# Altium PCB PICOROM-6412.PcbDoc
Units mm, origin at the board's own origin, x right, y up, seen from the top; angles counter-clockwise.
Board outline 30.48 x 17.8 mm, 4 copper layers (Top Layer, Mid-Layer 1, Layer 1, Bottom Layer), stack 1.591 mm thick; 56 components, 88 nets, 300 pads, 125 vias.
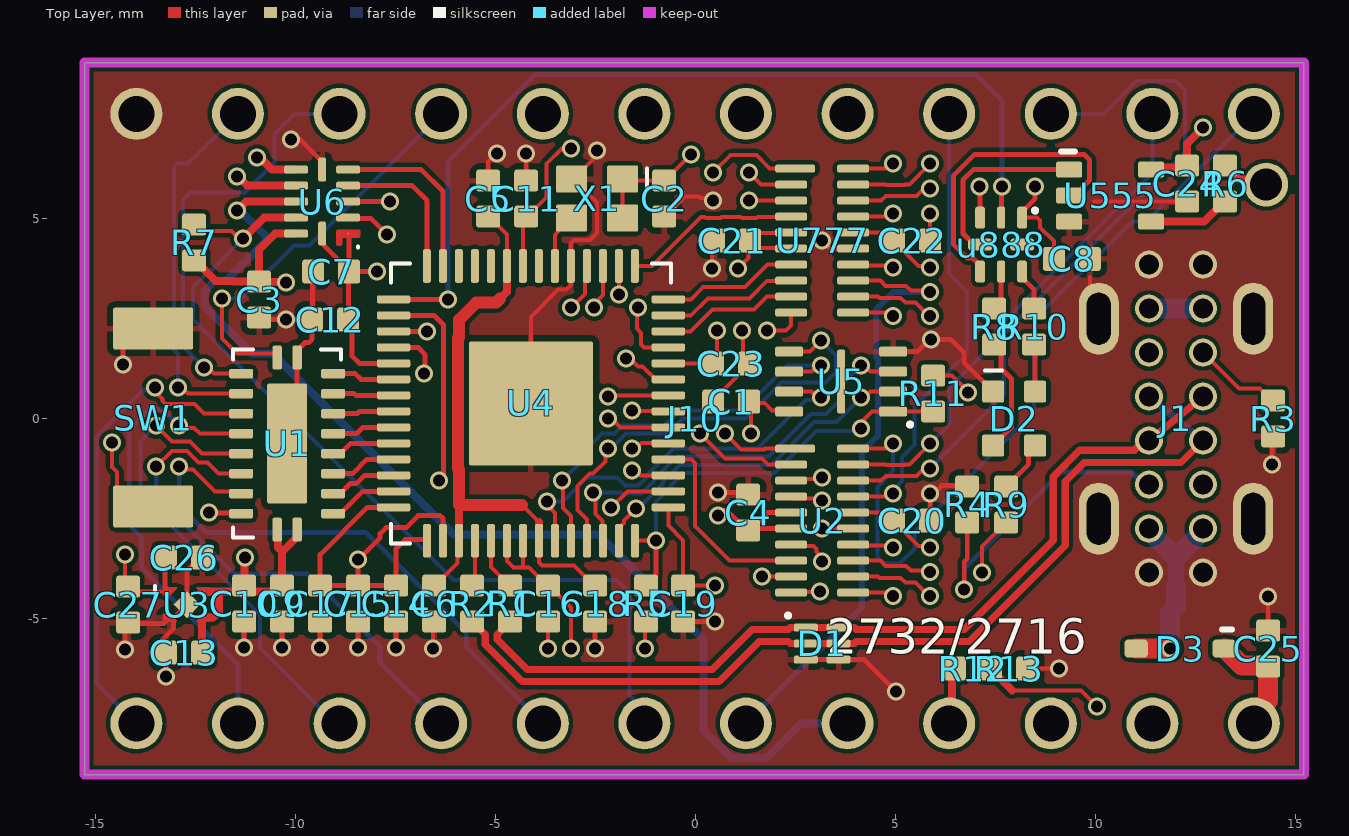
[diagram p0: Top Layer view]
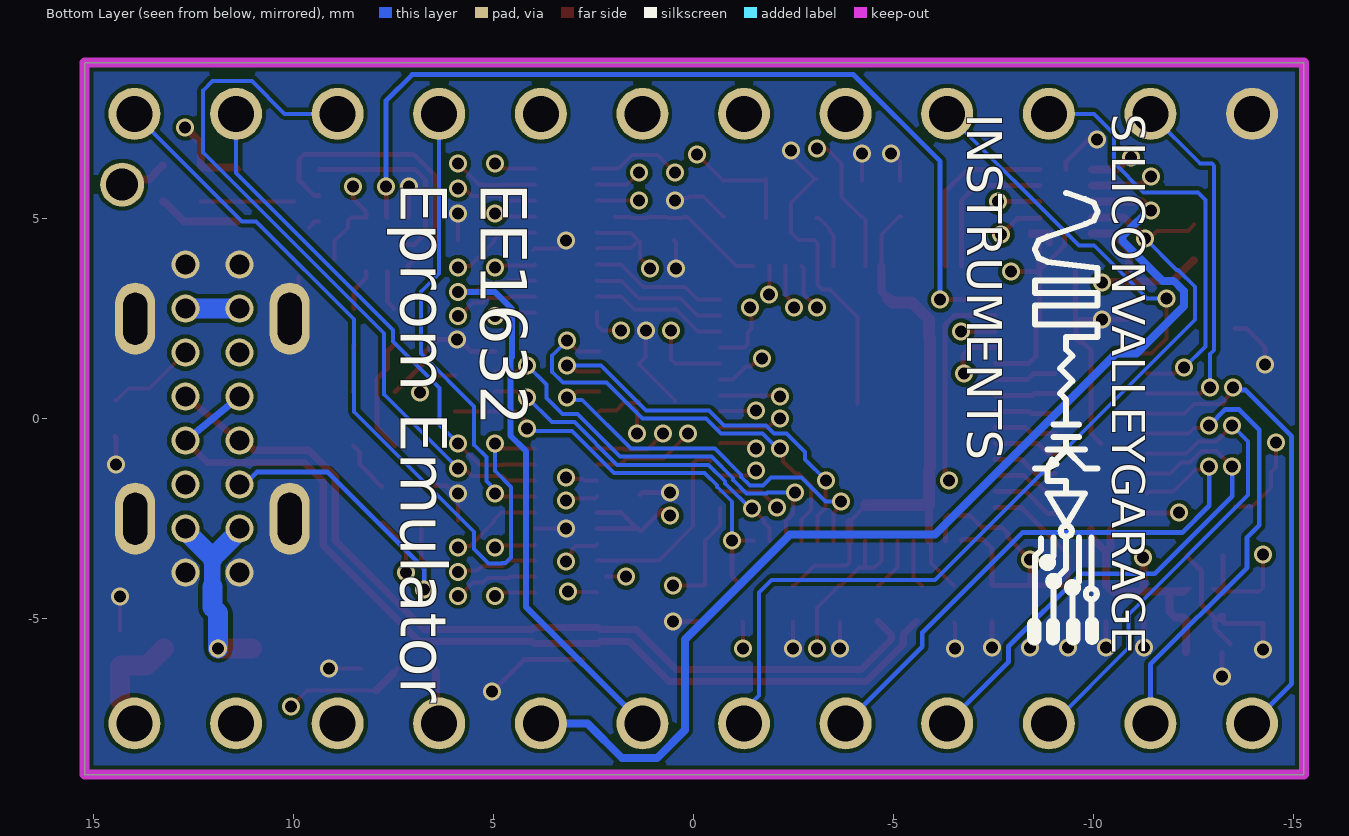
[diagram p1: Bottom Layer view, seen from below]
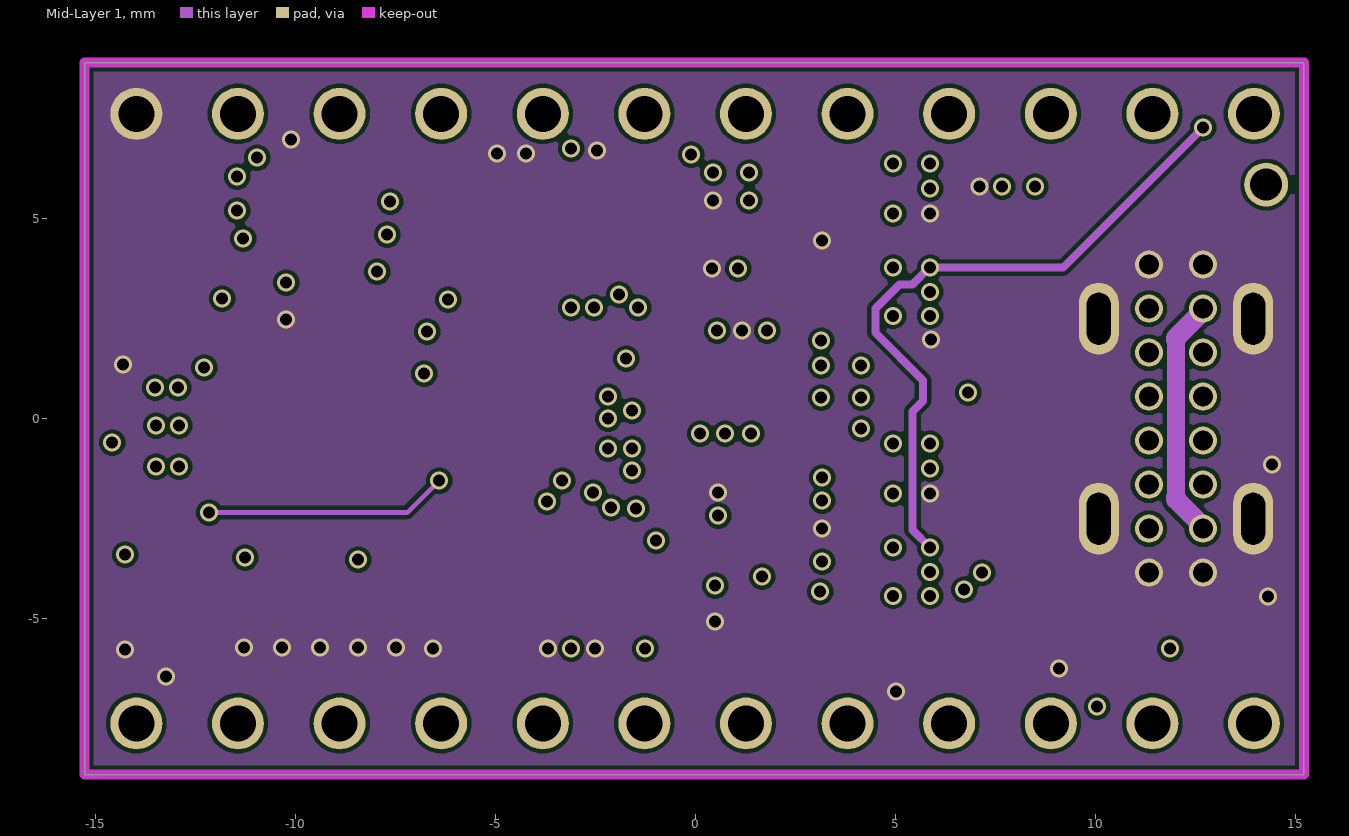
[diagram p2: Mid-Layer 1]
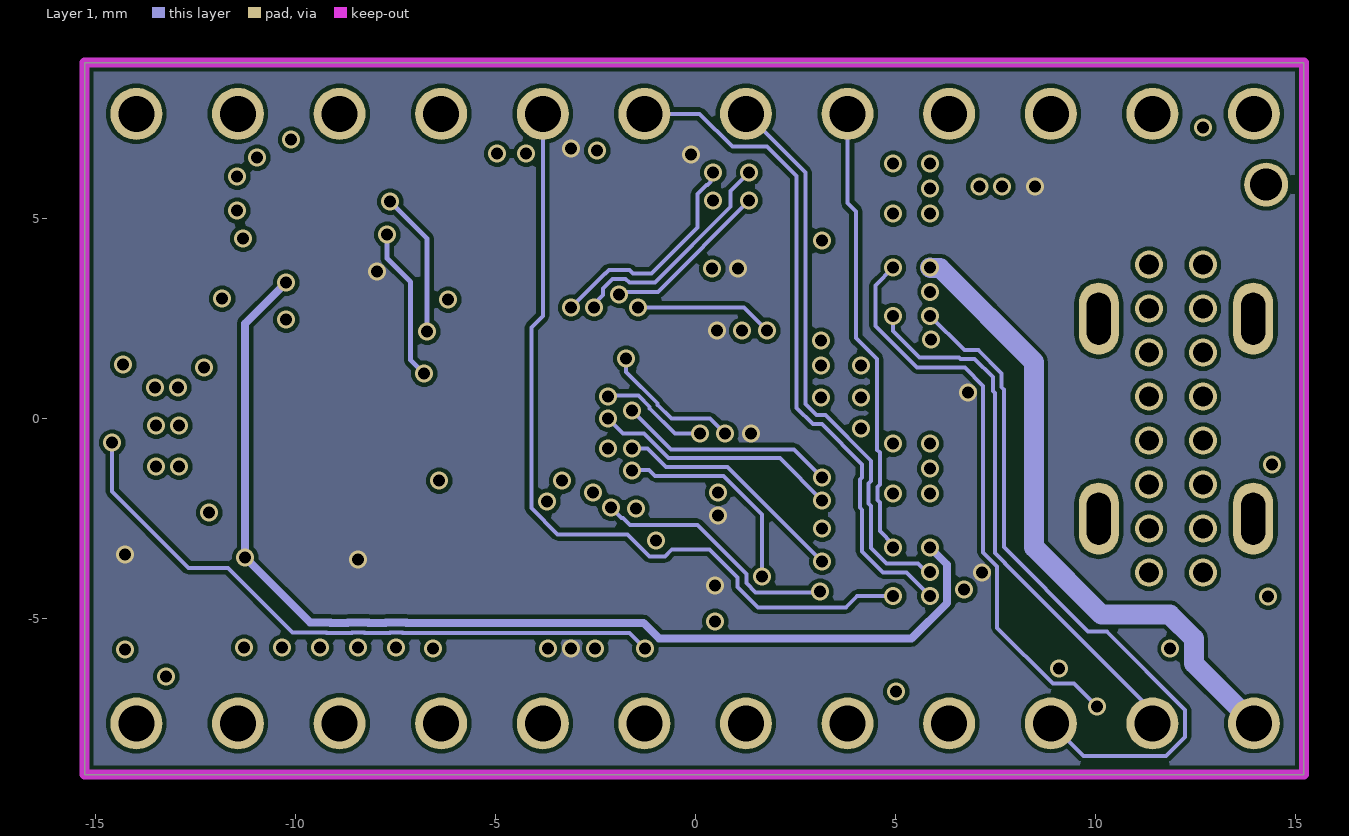
[diagram p3: Layer 1]
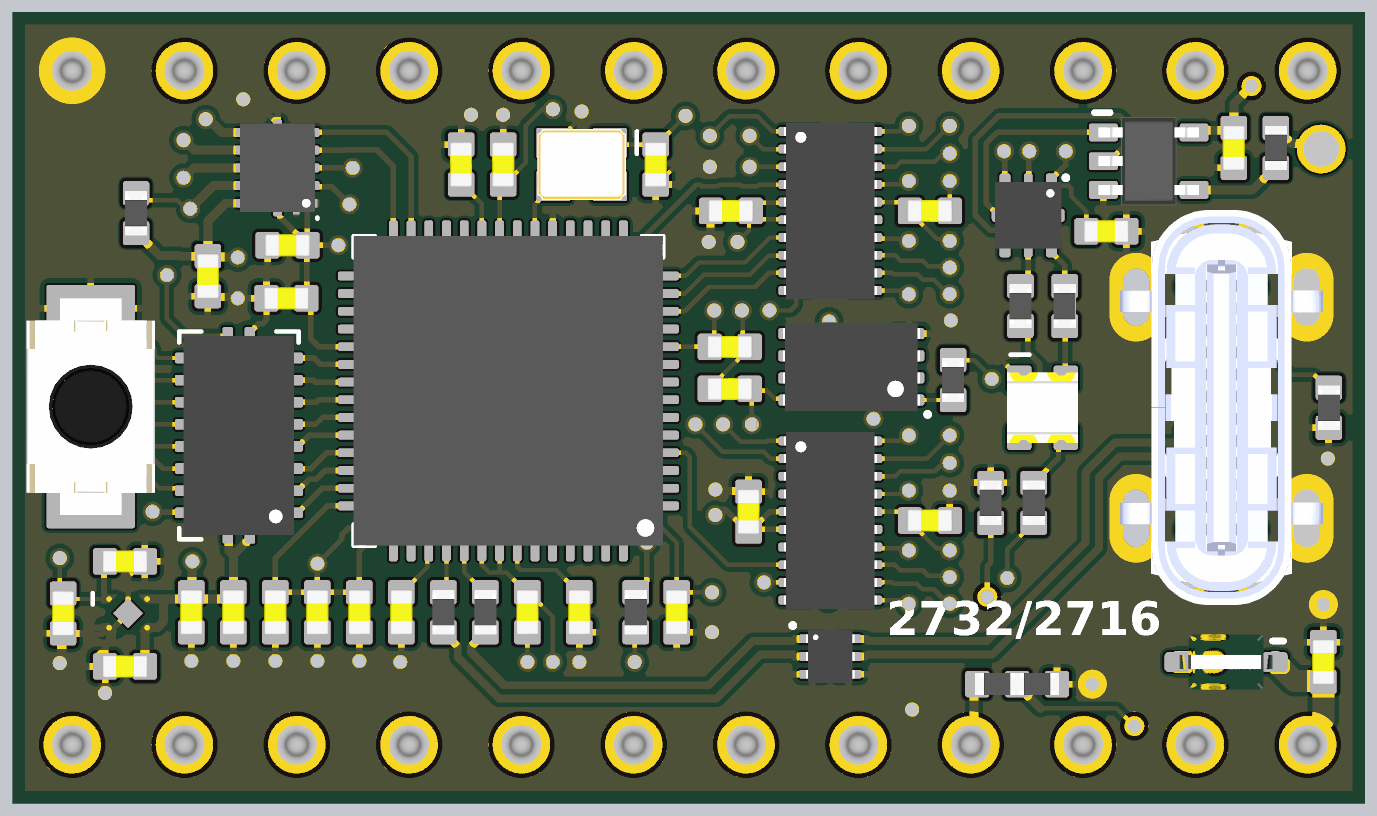
[diagram p4: 3D render of the assembled board from above, using the file's embedded part models]

## Layer stack, top to bottom
Top Solder: solder mask 0.0305, Solder Resist, Dk 3.8
Top Layer: signal copper 0.0356
Dielectric 1: dielectric 0.21, 7628 x 1, Dk 4.4
Mid-Layer 1: signal copper 0.0175
Dielectric2: dielectric 1.065, FR-4, Dk 4.8
Layer 1: signal copper 0.0175
Dielectric 2: dielectric 0.21, 7628 x 1, Dk 4.4
Bottom Layer: signal copper 0.0356
Board Layer Stack Bottom Solder: solder mask 0.0305, Solder Resist, Dk 3.8

## Board outline
-15.264,-8.9 -15.264,8.9 15.216,8.9 15.216,-8.9

## Design rules (kind name [scope] priority, off if disabled: settings)
Clearance [All] p1: gap=0.1 ignorepadtopadclearanceinfootprint=FALSE
ComponentClearance [All] p1 off: gap=0.1 collisioncheckmode=3 verticalgap=0.254 showdistances=FALSE
DiffPairsRouting [InDifferentialPairClass('USB_DIFF')] p1: maxlimit=0.127 minlimit=0.12 mostfreqgap=0.127 toplayer_maxgap=0.12 toplayer_prefgap=0.12 toplayer_minwidth=0.18 toplayer_maxwidth=0.18 toplayer_prefwidth=0.18 midlayer1_mingap=0.127 midlayer1_minwidth=0.144 midlayer1_maxwidth=0.144 midlayer1_prefwidth=0.144 midlayer4_mingap=0.127 midlayer4_minwidth=0.144 midlayer4_maxwidth=0.144 midlayer4_prefwidth=0.144 bottomlayer_maxgap=0.12 bottomlayer_prefgap=0.12 bottomlayer_minwidth=0.18 bottomlayer_maxwidth=0.18 bottomlayer_prefwidth=0.18 impedanceprofiledriven=TRUE impedanceprofileid={56849239-2FA1-4048-BED8-2869ACCAB6FC} impedanceprofilevalue=90.000000 maxuncoupledlength=12.7
Height [All] p1 off: minheight=0 maxheight=25.4 prefheight=12.7
HoleToHoleClearance [All] p1: gap=0.1 allowstackedmicrovias=TRUE
MinimumSolderMaskSliver [All] p1: minsoldermaskwidth=0.099
NetAntennae [All] p1: netantennaetolerance=0.1
PolygonConnect [All] p1: thpad.connectstyle=Direct thpad.reliefconductorwidth=0.254 thpad.reliefentries=4 thpad.polygonreliefangle="90 Angle" thpad.airgapwidth=0.254 smdpad.connectstyle=Relief smdpad.reliefconductorwidth=0.15 smdpad.reliefentries=4 smdpad.polygonreliefangle="90 Angle" smdpad.airgapwidth=0.15 via.connectstyle=Direct via.reliefconductorwidth=0.254 via.reliefentries=4 via.polygonreliefangle="90 Angle" via.airgapwidth=0.254
RoutingVias [All] p1: holewidth=0.3 width=0.45 viastyle="Through Hole" minholewidth=0.2 minwidth=0.45 maxholewidth=0.3 maxwidth=1
SilkToSilkClearance [All] p1: silktosilkclearance=0.1
SilkToSolderMaskClearance [IsPad] p1: minsilkscreentomaskgap=0.1 clearancetoexposedcopper=TRUE
SolderMaskExpansion [All] p1: expansion=0.102 istentingtop=FALSE
SupplyNets "Schematic Supply Nets_9" [InNet('RESET')] p1: voltage=0.000
SupplyNets "Schematic Supply Nets_7" [InNet('EXTRES')] p2: voltage=0.000
SupplyNets "Schematic Supply Nets_6" [InNet('P5V')] p3: voltage=0.000
SupplyNets "Schematic Supply Nets_4" [InNet('P1V1')] p4: voltage=0.000
SupplyNets "Schematic Supply Nets_3" [InNet('P3V3')] p5: voltage=0.000
SupplyNets "Schematic Supply Nets_1" [InNet('GND')] p6: voltage=0.000
SupplyNets "Schematic Supply Nets" [InNet('VUSB')] p7: voltage=0.000
Width [All] p1: maxlimit=5 minlimit=0.1 preferedwidth=0.1
22 further rules are at their usual default settings.

## Classes and differential pairs
differential pair class USB_DIFF: D USB
net class USB: D_N D_P USB_N USB_P
component class U_PicoROM-Core: C1 C2 C3 C4 C5 C6 C7 C8 C9 C10 C11 C12 C13 C14 C15 C16 C17 C18 C19 C20 C21 C22 C23 C24 C25 C26 C27 D1 D2 D3 J1 R1 R2 R3 R4 R5 R6 R7 R8 R9 R10 R11 SW1 U1 U2 U3 U4 U5 U6 U555 U777 U888 X1
component class 2716-2736: J10 R12 R13 U7
differential pair USB: +USB_P -USB_N
differential pair D: +D_P -D_N

## Components (designator, comment, footprint, x,y, rotation, side; value= is the part's Value field where it differs from the comment)
C1 "CAP0402" CAPC0402 0.9,0.425 r180 top
C2 "CAP0402" CAPC0402 -0.775,5.5 r270 top
C3 "CAP0402" CAPC0402 -10.9,2.975 r270 top
C4 "CAP0402" CAPC0402 1.325,-2.35 r90 top
C5 "CAP0402" CAPC0402 -5.175,5.5 r90 top
C6 "CAP0402" CAPC0402 -6.525,-4.625 r270 top
C7 "CAP0402" CAPC0402 -9.1,3.675 r180 top
C8 "CAP0402" CAPC0402 9.416,3.991 r0 top
C9 "CAP0402" CAPC0402 -10.325,-4.625 r270 top
C10 "CAP0402" CAPC0402 -11.275,-4.625 r270 top
C11 "CAP0402" CAPC0402 -4.225,5.5 r90 top
C12 "CAP0402" CAPC0402 -9.125,2.475 r180 top
C13 "CAP0402" CAPC0402 -12.775,-5.85 r180 top
C14 "CAP0402" CAPC0402 -7.475,-4.625 r270 top
C15 "CAP0402" CAPC0402 -8.425,-4.625 r270 top
C16 "CAP0402" CAPC0402 -3.675,-4.625 r270 top
C17 "CAP0402" CAPC0402 -9.375,-4.625 r270 top
C18 "CAP0402" CAPC0402 -2.5,-4.625 r270 top
C19 "CAP0402" CAPC0402 -0.3,-4.625 r270 top
C20 "CAP0402" CAPC0402 5.425,-2.55 r0 top
C21 "CAP0402" CAPC0402 0.925,4.45 r180 top
C22 "CAP0402" CAPC0402 5.425,4.45 r0 top
C23 "CAP0402" CAPC0402 0.9,1.375 r0 top
C24 "CAP0402" CAPC0402 12.3,5.875 r270 top
C25 "CAP0402" CAPC0402 14.325,-5.75 r90 top
C26 "CAP0402" CAPC0402 -12.775,-3.475 r0 top
C27 "CAP0402" CAPC0402 -14.175,-4.65 r270 top
D1 "CDDFN6-3312P" SON40P100X50-6L 3.175,-5.625 r0 top
D2 "RGB" LED-1616-RGB 7.975,0 r90 top
D3 "1N5819" SOD323 12.125,-5.75 r180 top
J1 "TYPE-C-612-LDRH650" CONN-USBC-USB2-VERT-XUNPU-TYPE-C-612-LDRH650 12.02,0 r270 top
J10 "IC-EPROM-2716-PINOUT" DIL24-PLUG 0,0 r180 top locked
R1 "RESC0402" RESC0402 -4.625,-4.625 r90 top value=27R
R2 "RESC0402" RESC0402 -5.575,-4.625 r90 top value=27R
R3 "RESC0402" RESC0402 14.45,0 r90 top value=5K1
R4 "RESC0402" RESC0402 6.8,-2.15 r90 top value=5K1
R5 "RESC0402" RESC0402 -1.225,-4.625 r90 top value=1K
R6 "RESC0402" RESC0402 13.25,5.875 r270 top value=27R
R7 "RESC0402" RESC0402 -12.525,4.4 r270 top value=100K
R8 "RESC0402" RESC0402 7.475,2.3 r90 top value=1K
R9 "RESC0402" RESC0402 7.775,-2.15 r270 top value=1K
R10 "RESC0402" RESC0402 8.475,2.3 r90 top value=1K
R11 "RESC0402" RESC0402 5.95,0.625 r90 top value=10K
R12 "RESC0402" RESC0402 6.95,-6.25 r180 top value=27R
R13 "RESC0402" RESC0402 7.85,-6.25 r180 top value=27R
SW1 "SWITCH-XUNPU-TS-1088-AR02016" SWITCH-XUNPU-TS-1088-AR02016 -13.55,0.025 r270 top
U1 "74AHCT245" QFN50P450X250-20TH300X100 -10.2,-0.625 r180 top
U2 "TXB108" SON40P200X55-20N 3.175,-2.55 r0 top
U3 "TPS7A0233PDQNR" X2SON4-1X1 -12.705,-4.65 r0 top
U4 "IC-RPI-RP2040-PICOROM" QFN40P700X700X90-56N-TH310X310 -4.105,0.381 r180 top locked
U5 "W25Q16JVUXIQ" SON50P300X60_HS-9N 3.65,0.925 r180 top
U6 "TXB104" FOOTPRINT-TI-RUT -9.325,5.425 r180 top
U555 "74LVC1GT126" SOT353 10.375,5.575 r0 top
U777 "TXB108" SON40P200X55-20N 3.175,4.45 r0 top
u888 "TCA5405" PQFN50P150X150X40-8N 7.65,4.35 r270 top (schematic designator U888)
X1 "XOSC" XOSC-YXC-2016 -2.45,5.5 r180 top

## Footprints (in the part's own frame and the unit in brackets; to place one, negate y for a bottom-side part, rotate by r counter-clockwise, add the part's x,y. Pads: shape width x height; smd on the part's side, far side on the other; paste and mask are expansions set on the pad)
CAPC0402 [mm] "CAPACITOR, CHIP 0402 (1005) 0.5MM THICK"
  rrect25% 0.55x0.6 smd paste+0 mask+0.075: 1(-0.45,0) 2(0.45,0)
  body extent -0.51,-0.25 0.51,0.26, height 0.52
CONN-USBC-USB2-VERT-XUNPU-TYPE-C-612-LDRH650 [mm] "CONN-USBC-USB2-VERT-XUNPU-TYPE-C-612-LDRH650"
  oval 1.8x1 hole 0.6 slot 1.3 at 0 deg: 1(-2.5,1.93) 2(2.5,1.93) 3(2.5,-1.93) 4(-2.5,-1.93)
  round 0.7 hole 0.5 mask+0.05: A1(-3.85,0.675) A4(-2.75,0.675) A5(-1.65,0.675) A6(-0.55,0.675) A7(0.55,0.675) A8(1.65,0.675) A9(2.75,0.675) A12(3.85,0.675) B1(3.85,-0.675) B4(2.75,-0.675) B5(1.65,-0.675) B6(0.55,-0.675) B7(-0.55,-0.675) B8(-1.65,-0.675) B9(-2.75,-0.675) B12(-3.85,-0.675)
  body extent -4.47,-2.3 4.47,2.3, height 6.41
DIL24-PLUG [mm]
  round 1.3 hole 0.9: 1(-13.97,-7.62) 2(-11.43,-7.62) 3(-8.89,-7.62) 4(-6.35,-7.62) 5(-3.81,-7.62) 6(-1.27,-7.62) 7(1.27,-7.62) 8(3.81,-7.62) 9(6.35,-7.62) 10(8.89,-7.62) 11(11.43,-7.62) 12(13.97,-7.62) 13(13.97,7.62) 14(11.43,7.62) 15(8.89,7.62) 16(6.35,7.62) 17(3.81,7.62) 18(1.27,7.62) 19(-1.27,7.62) 20(-3.81,7.62) 21(-6.35,7.62) 22(-8.89,7.62) 23(-11.43,7.62) 24(-13.97,7.62)
  body extent -15.24,-8.9 15.24,8.9, height 8.01
FOOTPRINT-TI-RUT [mm] "R-PUQFN-N12, TI RUT"
  round 0.025 smd paste+0 mask+0.05: 1(-0.65,0.8)
  rrect50% 0.6x0.2 smd paste+0 mask+0.05: 2(-0.65,0.4) 3(-0.65,0) 4(-0.65,-0.4) 5(-0.65,-0.8) 7(0.65,-0.8) 8(0.65,-0.4) 9(0.65,0) 10(0.65,0.4) 11(0.65,0.8)
  rrect50% 0.2x0.6 smd paste+0 mask+0.05: 6(0,-0.8) 12(0,0.8)
  Top Layer region: -0.9,0.9 -0.919,0.896 -0.935,0.885 -0.946,0.869 -0.95,0.85 -0.95,0.85 -0.95,0.75 -0.946,0.731 -0.935,0.715 -0.919,0.704 -0.9,0.7 -0.9,0.7 -0.4,0.7 -0.381,0.704 -0.365,0.715 -0.354,0.731 -0.35,0.75 -0.35,0.75 -0.35,1.05 -0.354,1.069 -0.365,1.085 -0.381,1.096 -0.4,1.1 -0.4,1.1 -0.45,1.1 -0.469,1.096 -0.485,1.085 -0.496,1.069 -0.5,1.05 -0.5,1.05 -0.5,0.95 -0.504,0.931 -0.515,0.915 -0.531,0.904 -0.55,0.9 -0.55,0.9
  silkscreen extent -0.9,1.12 -0.9,1.15, body extent -0.85,-1 0.85,1, height 0.55
LED-1616-RGB [mm]
  rrect18% 0.55x0.55 smd paste+0 mask+0.05: 1(0.675,0.525) 2(-0.675,0.525) 3(-0.675,-0.525) 4(0.675,-0.525)
  silkscreen extent 1.2,0.3 1.2,0.72, body extent -0.8,-0.8 0.8,0.8, height 0.71
PQFN50P150X150X40-8N [mm] "PQFN, 8-Leads, Body 1.50x1.50mm, Pitch 0.50mm, IPC Medium Density"
  rrect50% 0.55x0.25 smd mask+0.05: 1(-0.675,0.525) 3(-0.675,-0.525) 5(0.675,-0.525) 7(0.675,0.525)
  rrect50% 0.55x0.2 smd mask+0.05: 2(-0.675,0) 6(0.675,0)
  rrect50% 0.3x0.6 smd mask+0.05: 4(0,-0.525) 8(0,0.525)
  silkscreen extent -0.9,0.8 -0.8,0.9, body extent -0.75,-0.75 0.75,0.75, height 0.4
QFN40P700X700X90-56N-TH310X310 [mm]
  rrect50% 0.84x0.2 smd mask+0.05: 1(-3.435,2.6) 2(-3.435,2.2) 3(-3.435,1.8) 4(-3.435,1.4) 5(-3.435,1) 6(-3.435,0.6) 7(-3.435,0.2) 8(-3.435,-0.2) 9(-3.435,-0.6) 10(-3.435,-1) 11(-3.435,-1.4) 12(-3.435,-1.8) 13(-3.435,-2.2) 14(-3.435,-2.6) 29(3.435,-2.6) 30(3.435,-2.2) 31(3.435,-1.8) 32(3.435,-1.4) 33(3.435,-1) 34(3.435,-0.6) 35(3.435,-0.2) 36(3.435,0.2) 37(3.435,0.6) 38(3.435,1) 39(3.435,1.4) 40(3.435,1.8) 41(3.435,2.2) 42(3.435,2.6)
  rrect50% 0.2x0.84 smd mask+0.05: 15(-2.6,-3.435) 16(-2.2,-3.435) 17(-1.8,-3.435) 18(-1.4,-3.435) 19(-1,-3.435) 20(-0.6,-3.435) 21(-0.2,-3.435) 22(0.2,-3.435) 23(0.6,-3.435) 24(1,-3.435) 25(1.4,-3.435) 26(1.8,-3.435) 27(2.2,-3.435) 28(2.6,-3.435) 43(2.6,3.435) 44(2.2,3.435) 45(1.8,3.435) 46(1.4,3.435) 47(1,3.435) 48(0.6,3.435) 49(0.2,3.435) 50(-0.2,3.435) 51(-0.6,3.435) 52(-1,3.435) 53(-1.4,3.435) 54(-1.8,3.435) 55(-2.2,3.435) 56(-2.6,3.435)
  rrect3% 3.1x3.1 smd paste-0.57 mask+0.05: 57(0,0)
  silkscreen extent -3.5,-3.5 3.5,3.5, body extent -3.5,-3.5 3.5,3.5, height 0.9
QFN50P450X250-20TH300X100 [mm]
  rrect41% 0.24x0.6 smd mask+0.051: 1(-0.25,2.15) 10(-0.25,-2.15) 11(0.25,-2.15) 20(0.25,2.15)
  rrect41% 0.6x0.24 smd mask+0.051: 2(-1.15,1.75) 3(-1.15,1.25) 4(-1.15,0.75) 5(-1.15,0.25) 6(-1.15,-0.25) 7(-1.15,-0.75) 8(-1.15,-1.25) 9(-1.15,-1.75) 12(1.15,-1.75) 13(1.15,-1.25) 14(1.15,-0.75) 15(1.15,-0.25) 16(1.15,0.25) 17(1.15,0.75) 18(1.15,1.25) 19(1.15,1.75)
  rrect10% 1x3 smd mask+0.051: 21(0,0)
  silkscreen extent -1.35,-2.35 1.35,2.35, body extent -1.25,-2.25 1.25,2.25, height 0.9
RESC0402 [mm] "RESISTOR, CHIP 0402 (1005)"
  rrect25% 0.55x0.6 smd paste+0 mask+0.075: 1(-0.45,0) 2(0.45,0)
  body extent -0.5,-0.25 0.5,0.25, height 0.27
SOD323 [mm] "SOD323"
  rrect44% 0.59x0.45 smd paste+0 mask+0.05: 1(-1.1,0) 2(1.1,0)
  silkscreen extent -1.3,-0.48 -1.05,-0.48, body extent -1.25,-0.63 1.25,0.63, height 1.1
SON40P100X50-6L [mm] "SON, 6-Leads, Body 1.20x1.00mm, Pitch 0.40mm, IPC High Density"
  rrect50% 0.6x0.2 smd mask+0.05: 1(-0.41,0.4) 2(-0.41,0) 3(-0.41,-0.4) 4(0.41,-0.4) 5(0.41,0) 6(0.41,0.4)
  silkscreen extent -0.9,0.65 -0.8,0.75, body extent -0.55,-0.6 0.55,0.6, height 0.5
SON40P200X55-20N [mm] "SON, 20-Leads, Body 4.00x2.00mm, Pitch 0.40mm, IPC Medium Density"
  rrect50% 1x0.2 smd mask+0.05: 1(-0.675,1.8)
  rrect50% 0.8x0.2 smd mask+0.05: 2(-0.775,1.4) 3(-0.775,1) 4(-0.775,0.6) 5(-0.775,0.2) 6(-0.775,-0.2) 7(-0.775,-0.6) 8(-0.775,-1) 9(-0.775,-1.4) 10(-0.775,-1.8) 11(0.775,-1.8) 12(0.775,-1.4) 13(0.775,-1) 14(0.775,-0.6) 15(0.775,-0.2) 16(0.775,0.2) 17(0.775,0.6) 18(0.775,1) 19(0.775,1.4) 20(0.775,1.8)
  body extent -1.05,-2 1.05,2, height 0.55
SON50P300X60_HS-9N [mm] "SON, 8-Leads, Body 2.00x3.00mm, Pitch 0.50mm, Thermal Pad 1.60x0.20mm, IPC Medium Density"
  rrect40% 0.7x0.25 smd mask+0.05: 1(-1.3,0.75) 2(-1.3,0.25) 3(-1.3,-0.25) 4(-1.3,-0.75) 5(1.3,-0.75) 6(1.3,-0.25) 7(1.3,0.25) 8(1.3,0.75)
  rrect50% 0.2x1.6 smd mask+0.05: 9(0,0)
  silkscreen extent -1.78,1.03 -1.68,1.12, body extent -1.55,-1 1.55,1, height 0.6
SOT353 [mm] "SOT353 SC70-5"
  rrect25% 0.65x0.4 smd paste+0 mask+0.05: 1(-1.025,0.65) 2(-1.025,0) 3(-1.025,-0.65) 4(1.025,-0.65) 5(1.025,0.65)
  silkscreen extent -1.22,1.1 -0.87,1.1, body extent -1.14,-1 1.14,1, height 0.94
SWITCH-XUNPU-TS-1088-AR02016 [mm] "LCSC C720477"
  rrect9% 1.05x2 smd paste+0 mask+0.05: 1(-2.225,0) 2(2.225,0)
  body extent -2.45,-1.45 2.45,1.45, height 2
X2SON4-1X1 [mm] "FOOTPRINT, TI, DQN0004A X2SON4"
  round 0.025 smd mask+0.05: 1(-0.43,0.325) 2(-0.43,-0.325) 3(0.43,-0.325) 4(0.43,0.325)
  rrect4% 0.48x0.48 smd rot 45 mask+0.05: 5(0,0)
  Top Layer region: 0.43,0.22 0.25,0.4 0.25,0.43 0.559,0.43 0.579,0.426 0.595,0.415 0.606,0.399 0.61,0.379 0.61,0.379 0.61,0.271 0.606,0.251 0.595,0.235 0.579,0.224 0.559,0.22 0.559,0.22 0.52,0.22
  Top Layer region: -0.43,0.22 -0.25,0.4 -0.25,0.43 -0.559,0.43 -0.579,0.426 -0.595,0.415 -0.606,0.399 -0.61,0.379 -0.61,0.379 -0.61,0.271 -0.606,0.251 -0.595,0.235 -0.579,0.224 -0.559,0.22 -0.559,0.22 -0.52,0.22
  Top Layer region: -0.43,-0.22 -0.25,-0.4 -0.25,-0.43 -0.559,-0.43 -0.579,-0.426 -0.595,-0.415 -0.606,-0.399 -0.61,-0.379 -0.61,-0.379 -0.61,-0.271 -0.606,-0.251 -0.595,-0.235 -0.579,-0.224 -0.559,-0.22 -0.559,-0.22 -0.52,-0.22
  Top Layer region: 0.43,-0.22 0.25,-0.4 0.25,-0.43 0.559,-0.43 0.579,-0.426 0.595,-0.415 0.606,-0.399 0.61,-0.379 0.61,-0.379 0.61,-0.271 0.606,-0.251 0.595,-0.235 0.579,-0.224 0.559,-0.22 0.559,-0.22 0.52,-0.22
  silkscreen extent -0.8,0.2 -0.8,0.46, body extent -0.5,-0.5 0.5,0.5, height 0.4
XOSC-YXC-2016 [mm] "YSO110TR"
  rrect10% 0.775x0.675 smd paste+0 mask+0.05: 1(-0.637,-0.487) 2(0.637,-0.487) 3(0.637,0.487) 4(-0.637,0.487)
  silkscreen extent -1.25,-0.75 -1.25,-0.24, body extent -1,-0.8 1,0.8, height 0.76

## Part data
C1 C2 C3 C4 C5 C6 C7 C8 C9 C10 C11 C12 C13 C14 C15 C16 C17 C18 C19 C20 C21 C22 C23 C24 C25 C26 C27: library part CAPC-0402-100nF-16V-X7R, "CAPACITOR,CERAMIC,100nF,16V,X7R,0402", Capacitance=100nF, Dielectric=X7R, LCSC=C60474, Manufacturer 1=YAGEO, Manufacturer Part Number 1=CC0402KRX7R7BB104, Package / Case=0402, Supplier Part Number 1=1292-1630-1-ND, Voltage=16V, MOUSER=603-CC402KRX7R7BB104, Supplier 1=Digikey
D1: library part TVS-BOURNS-CDDFN6-3312P, "TVS,USB,BOURNS,CDDFN6-3312P", LCSC=C3700524, Manufacturer 1=BOURNS, Manufacturer Part Number 1=CDDFN6-3312P
D2: library part LED-TOGIALED-TJ-S1615CY6TGLCCSRGB-A5, "LED,SMD,RGB", LCSC=C601684, Manufacturer 1=TIOGALED, Manufacturer Part Number 1=TJ-S1615CY6TGLCCSRGB-A5
D3: library part DIODE-SCHOTTKY-1N5819-SOD323, "DIODE,SCHOTTKY,40V,0.6A,1N5819,SOD323", LCSC=C191023, Manufacturer 1="GUANGDONG HOTTECH", Manufacturer Part Number 1=1N5819WS, MOUSER=637-SK115
J1: library part CONN-USBC-USB2-VERT-XUNPU-TYPE-C-612-LDRH650, "CONN,USB-C,16P,VERTICAL,TH", LCSC=C25011963, Manufacturer 1=XUNPU, Manufacturer Part Number 1=TYPE-C-612-LDRH650
J10: "CONN,DIP24,MALE PINHEADER,TURNED PIN,GOLD", Manufacturer 1=CNCTECH, Manufacturer Part Number 1=220-1-24-006, DIGIKEY=1175-1524-5-ND
R1 R2 R6 R12 R13: library part RESC-0402-27R-1%-1/10W, "RESISTOR,27R,1%,63mW,0402 (1005)", LCSC=C138021, Power=1/16W, Supplier Part Number 1=2577120, Tolerance=1%, Supplier 1="Future Electronics"
R3 R4: library part RESC-0402-5K1-1%-1/10W, "RESISTOR,5K1,1%,63mW,0402 (1005)", LCSC=C25905, Manufacturer 1=UNIROYAL, Manufacturer Part Number 1=0402WGF5101TCE, Power=1/16W, Tolerance=1%
R5 R8 R9 R10: library part RESC-0402-1K-1%-1/10W, "RESISTOR,1K,1%,63mW,0402 (1005)", LCSC=C11702, Manufacturer 1=UNIROYAL, Manufacturer Part Number 1=0402WGF1001TCE, Power=1/16W, Tolerance=1%
R7: library part RESC-0402-100K-1%-1/10W, "RESISTOR,100K,1%,63mW,0402 (1005)", LCSC=C25741, Manufacturer 1=UNIROYAL, Manufacturer Part Number 1=0402WGF1003TCE, Power=1/16W, Tolerance=1%
R11: library part RESC-0402-10K-1%-1/10W, "RESISTOR,10K,1%,63mW,0402 (1005)", LCSC=C25744, Manufacturer 1=UNIROYAL, Manufacturer Part Number 1=0402WGF1002TCE, Power=1/16W, Tolerance=1%
SW1: "SWITCH,TACT,SMD,2PIN,SMT,TOP ACTUATOR", LCSC=C720477, Manufacturer 1=XUNPU, Manufacturer Part Number 1=TS-1088-AR02016
U1: library part IC-NEXPERIA-74AHCT245, "IC,BUS BUFFER,74245, QQFN420X250", LCSC=C554611, Manufacturer 1=NEXPERIA, Manufacturer Part Number 1=74AHCT245BQ,115
U2 U777: library part IC-TI-TXB0108-DQS, "IC,LEVEL SHIFTER,8CH,DUAL SUPPLY, TI TXB108", LCSC=C427057, Manufacturer 1=TI, Manufacturer Part Number 1=TXB0108DQSR
U3: library part IC-TI-TPS7A0233PDQNR, "IC,VOLTAGE REG,LIN,POSITIVE,3V3", LCSC=C2860046, Manufacturer 1=TI, Manufacturer Part Number 1=TPS7A0233PDQNR
U4: "IC,MICROCONTROLLER,RP2040, PICOROM SYMBOL", LCSC=C2040, Manufacturer 1=RPI, Manufacturer Part Number 1=RP2040
U5: library part IC-WINBOND-W25Q16JVUXIQ, "IC,FLASH,16Mbit, USON", LCSC=C2843335, Manufacturer 1=WINBOND, Manufacturer Part Number 1=W25Q16JVUXIQ
U6: library part IC-TI-TXB0104-RUT, "IC,LEVEL SHIFTER,4CH,DUAL SUPPLY, TI TXB104", LCSC=C105266, Manufacturer 1=TI, Manufacturer Part Number 1=TXB0104RUTR
U555: library part IC-ONSEMI-M74VHC1GT126DF2G, "IC,BUFFER WITH OE, ONSEMI M74VHC1GT126DF2G", LCSC=C233496, Manufacturer 1=ONSEMI, Manufacturer Part Number 1=M74VHC1GT126DF2G
u888: library part IC-TI-TCA5405RUGR, "IC,IO EXPANDER, SINGLE WIRE, 5 OUTPUTS, TI TCA5405", LCSC=C2674123, Manufacturer 1=TI, Manufacturer Part Number 1=TCA5405RUGR, MPN=C2674123
X1: library part XOSC-YXC-OT201612MJBA4SL, "XOSC,12MHz,2016", LCSC=C669076, Manufacturer 1="YXC Crystal Oscillators", Manufacturer Part Number 1=OT201612MJBA4SL

## Free pads (board coordinates)
  round 1.1 hole 0.8 mask+0.05: 2(14.275,5.85)

## Via types
v1: diameter 0.45, hole 0.3, Top Layer to Bottom Layer, tented both sides, 119 vias
v2: diameter 0.45, hole 0.3, Top Layer to Bottom Layer, 6 vias

## Nets (pads, with @x,y where several pads share a name; then routed paths per layer and width w, separated by ;. In a path a pad name is that pad's centre, name@x,y a point inside that pad or via, vN(x,y) a via of type N, cw(c..) or ccw(c..) an arc to the next point about the centre after c; other vN are vias at no path point)
A0: U2.10 U4.2 | length 8.6
  Top Layer w0.1: v1(-2.1,-2.225) -1.694,-1.819 U4.2 ; U2.10 2.413,-4.337 3.113,-4.337 v1(3.125,-4.325)
  Layer 1 w0.1: v1(-2.1,-2.225) -1.843,-2.482 -1.802,-2.482 -1.629,-2.655 0.054,-2.655 1.28,-3.881 1.28,-4.114 1.511,-4.345 3.105,-4.345 v1(3.125,-4.325)
A1: U2.9 U4.3 | length 6.7
  Top Layer w0.1: v1(-1.575,-1.3) -1.48,-1.3 -1.361,-1.419 U4.3 ; v1(1.675,-3.95) U2.9@2.175,-3.95
  Layer 1 w0.1: v1(-1.575,-1.3) -1.555,-1.28 -1.15,-1.28 -1,-1.43 0.714,-1.43 1.675,-2.391 v1(1.675,-3.95)
A2: U2.8 U4.4 | length 4.8
  Top Layer w0.1: U4.4@-0.431,-1.056 -0.394,-1.019 -0.096,-1.019 0,-1.115 0,-2.689 0.861,-3.55 U2.8
A3: U2.7 U4.5 | length 7.9
  Top Layer w0.1: v1(-1.575,-0.75) -1.48,-0.75 -1.34,-0.609 -0.68,-0.609 U4.5 ; U2.7 2.437,-3.187 2.961,-3.187 3.032,-3.258 3.032,-3.337 3.175,-3.48 v1(3.175,-3.575)
  Layer 1 w0.1: v1(-1.575,-0.75) -1.191,-0.75 -0.731,-1.21 0.805,-1.21 0.845,-1.25 0.85,-1.25 v1(3.175,-3.575)
A4: U2.4 U4.6 | length 8.6
  Top Layer w0.1: v1(-2.175,0) -2.083,0 -1.864,-0.219 U4.6 ; U2.4 2.45,-2 3.125,-2 v1(3.175,-2.05)
  Layer 1 w0.1: v1(-2.175,0) -1.8,-0.375 -1.283,-0.375 -0.668,-0.99 2.115,-0.99 v1(3.175,-2.05)
A5: U2.3 U4.7 | length 7.2
  Top Layer w0.1: v1(-1.575,0.2) -1.566,0.191 -0.68,0.191 U4.7 ; U2.3@2.404,-1.55 2.713,-1.55 2.75,-1.513 3.137,-1.513 v1(3.175,-1.475)
  Layer 1 w0.1: v1(-1.575,0.2) -0.605,-0.77 2.47,-0.77 v1(3.175,-1.475)
A6: U2.2 U4.8 | length 6.8
  Top Layer w0.1: v1(-2.175,0.55) -2.144,0.581 U4.8 ; v1(0.125,-0.375) 0.747,-0.997 1.669,-0.997 1.822,-1.15 U2.2
  Layer 1 w0.1: v1(-2.175,0.55) -2.15,0.575 -1.42,0.575 -1.135,0.291 -1.135,0.257 -0.504,-0.375 v1(0.125,-0.375)
A7: U2.1 U4.9 | length 6.7
  Top Layer w0.1: v1(-1.725,1.5) -1.63,1.5 -1.432,1.302 -1.322,1.302 -1.131,1.111 -1.12,1.111 -0.99,0.981 U4.9 ; v1(0.75,-0.375) 1.145,-0.77 1.729,-0.77 1.749,-0.75 U2.1
  Layer 1 w0.1: v1(-1.725,1.5) -1.725,1.163 -0.935,0.374 -0.935,0.339 -0.596,0 0.375,0 v1(0.75,-0.375)
A8: U4.11 U777.10 | length 6.1
  Top Layer w0.1: v1(-1.425,2.775) -1.46,2.74 -1.46,2.247 -1.357,2.144 -1.357,1.858 -1.278,1.778 -0.673,1.778 U4.11 ; v1(1.8,2.2) 2.275,2.2 2.4,2.325 U777.10
  Layer 1 w0.1: v1(-1.425,2.775) 1.225,2.775 v1(1.8,2.2)
A9: U4.12 U777.9 | length 3.4
  Top Layer w0.1: U4.12 -0.119,2.181 0.431,2.731 1.472,2.731 1.79,3.05 U777.9
A10: U4.13 U777.8 | length 3.4
  Top Layer w0.1: U4.13 -0.111,2.581 0.317,3.008 1.357,3.008 1.79,3.441 2.391,3.441 U777.8
A11: U4.14 U777.7 | length 3.4
  Top Layer w0.1: U4.14 -0.102,2.981 0.202,3.285 1.242,3.285 1.807,3.85 U777.7
A12: U4.15 U777.4 | length 4
  Top Layer w0.1: U4.15 -1.084,3.816 0.141,5.041 0.237,5.041 0.268,5.01 0.632,5.01 0.663,5.041 1.137,5.041 1.168,5.01 1.532,5.01 1.563,5.041 1.959,5.041
A13: U4.16 U777.3 | length 6
  Top Layer w0.1: U4.16 -1.902,3.813 -1.902,3.102 v1(-1.9,3.1) ; v1(1.35,5.45) U777.3
  Layer 1 w0.1: v1(-1.9,3.1) -1.833,3.167 -1.592,3.167 -1.589,3.17 -0.93,3.17 v1(1.35,5.45)
A14: U4.17 U777.2 | length 8
  Top Layer w0.1: v1(-2.525,2.775) -2.525,2.865 -2.305,3.085 U4.17 ; v1(1.35,6.15) 1.65,5.85 U777.2
  Layer 1 w0.1: v1(-2.525,2.775) -2.525,2.867 -2.306,3.086 -2.306,3.253 -2.064,3.495 -1.736,3.495 -1.646,3.405 -1.006,3.405 0.89,5.301 0.89,5.632 0.887,5.634 0.887,5.687 v1(1.35,6.15)
A15: U4.18 U777.1 | length 9.2
  Top Layer w0.1: v1(-3.1,2.775) -2.755,3.12 -2.755,3.766 U4.18 ; v1(0.45,6.15) 0.89,6.59 1.532,6.59 1.79,6.332 1.79,6.323 1.863,6.25 U777.1
  Layer 1 w0.1: v1(-3.1,2.775) -2.25,3.625 -2.245,3.625 -2.155,3.715 -1.645,3.715 -1.555,3.625 -1.097,3.625 0.055,4.777 0.055,5.614 0.286,5.845 0.308,5.845 0.383,5.921 0.383,6.083 v1(0.45,6.15)
A16: U4.27 U6.5 | length 4.5
  Top Layer w0.125: U6.5 -6.85,6.225 -6.305,5.68 U4.27
A17: U4.28 U6.4 | length 3.8
  Top Layer w0.125: U6.4 -7.801,5.825 -7.794,5.833 -7.083,5.833 -6.705,5.455 U4.28
CE: U4.32 U6.2 | length 6.4
  Top Layer w0.125: U6.2 -8.65,5 -8.1,5 v1(-7.7,4.6) ; U4.32 -6.931,1.781 -6.75,1.6 -6.75,1.15 v1(-6.775,1.125)
  Layer 1 w0.125: v1(-7.7,4.6) -7.7,4.001 -7.112,3.414 -7.112,1.462 v1(-6.775,1.125)
D0: U1.9 U4.34 | length 1.6
  Top Layer w0.125: U1.9 -8.5,1.125 -8.356,0.981 U4.34
D1: U1.8 U4.35 | length 1.5
  Top Layer w0.125: U1.8 -8.525,0.625 -8.475,0.575 -7.546,0.575 U4.35
D2: U1.7 U4.36 | length 1.5
  Top Layer w0.125: U1.7 -8.45,0.125 -8.394,0.181 U4.36
D3: U1.6 U4.37 | length 1.6
  Top Layer w0.125: U1.6 -9.049,-0.374 -8.461,-0.374 -8.306,-0.219 U4.37
D4: U1.5 U4.38 | length 1.6
  Top Layer w0.125: U1.5 -8.87,-0.875 -8.614,-0.619 U4.38
D5: U1.4 U4.39 | length 1.7
  Top Layer w0.125: U1.4 -8.563,-1.375 -8.207,-1.019 U4.39
D6: U1.3 U4.40 | length 1.7
  Top Layer w0.125: U1.3 -8.87,-1.875 -8.615,-1.62 -8.461,-1.62 -8.26,-1.419 U4.40
D7: U1.2 U4.41 | length 1.7
  Top Layer w0.125: U1.2 -8.87,-2.375 -8.314,-1.819 U4.41
D_N: D1.2 D1.5 J1.A7 J1.B7 R2.1 | length 24.3
  Top Layer w0.18: R2.1 -5.25,-5.4 -5.25,-5.649 -4.324,-6.575 0.599,-6.575 1.599,-5.575 2.325,-5.575 2.375,-5.625 D1.2 D1.5 3.975,-5.625 4.025,-5.575 6.849,-5.575 9.25,-3.174 9.25,-1.575 9.725,-1.1 12.145,-1.1 J1.A7
  Bottom Layer w0.18: J1.B7 J1.A7
D_P: D1.1 D1.6 J1.A6 J1.B6 R1.1 | length 22.3
  Top Layer w0.18: R1.1 -4.95,-5.4 -4.95,-5.525 -4.2,-6.275 0.425,-6.275 1.425,-5.275 2.325,-5.275 2.375,-5.225 D1.1 D1.6 3.975,-5.225 4.025,-5.275 6.725,-5.275 8.95,-3.05 8.95,-1.451 9.611,-0.79 10.98,-0.79 11.22,-0.55 J1.B6 J1.A6
EXT_RESET_EN: U555.1 u888.4 | length 4.6
  Top Layer w0.125: u888.4 6.975,4.35 6.698,4.627 6.698,5.969 6.954,6.225 U555.1
EXT_RESET_VALUE: U555.2 u888.5 | length 7.6
  Top Layer w0.125: u888.5 7.125,3.825 6.933,4.017 6.793,4.018 6.642,4.168 6.453,4.358 6.453,6.07 6.99,6.608 8.979,6.608 9.513,6.608 9.721,6.608 9.858,6.471 9.858,5.979 9.858,5.957 9.475,5.575 U555.2
EXTRES: pad.2 R6.1 | length 1.2
  Top Layer w0.2: R6.1 13.275,6.325 13.45,6.15 13.45,6.125 13.599,5.976 14.149,5.976 pad.2
GND: C1.2 C2.2 C3.2 C4.2 C5.2 C6.2 C7.2 C8.2 C9.2 C10.2 C11.2 C12.2 C13.2 C14.2 C15.2 C16.2 C17.2 C18.2 C19.2 C20.2 C21.2 C22.2 C23.2 C24.2 C25.2 C26.2 C27.2 D1.3 D1.4 D2.1 J1.1 J1.2 J1.3 J1.4 J1.A1 J1.A12 J1.B1 J1.B12 J10.12 R3.1 R4.2 R13.1 SW1.1 U1.10 U1.21 U2.15 U3.2 U3.5 U4.19 U4.57 U5.4 U6.6 U555.3 U777.15 u888.3 X1.2 | length 51.2
  Top Layer w0.1: v1(-6.55,-5.75) -6.55,-5.125 C6.2@-6.525,-5.1 ; C5.2 -5.175,6.425 -4.975,6.625 v1(-4.95,6.625) ; C11.2 v1(-4.225,6.625) ; U4.57 -4.105,2.545 -3.424,3.226 -3.223,3.226 -3.105,3.344 U4.19 -3.105,4.387 -3.032,4.46 -2.899,4.46 ; v1(-3.675,-5.75) C16.2 ; X1.2 X1.2@-3.037,5.987 ; -2.855,4.46 -2.631,4.46 -2.45,4.641 -2.45,5.4 X1.2@-3.037,5.987 ; v1(-2.5,-5.75) C18.2 ; v1(-2.45,6.7) -2.512,6.638 -2.512,6.512 X1.2@-3.037,5.987 ; C2.2 -0.75,5.05 -0.25,5.55 0.1,5.55 0.138,5.512 0.388,5.512 v1(0.45,5.45) ; v1(0.425,3.75) 0.425,4.4 C21.2 ; C1.2 0.45,0.45 1.35,1.35 C23.2 1.191,1.534 1.191,2.184 v1(1.175,2.2) ; v1(3.175,-2.75) U2.15 ; v1(3.175,4.45) 3.375,4.25 U777.15 U777.15@3.987,4.213 ; C20.2 v1(5.875,-1.875) ; C22.2 v1(5.875,5.125) ; R13.1 v2(9.1,-6.25) v2@9.125,-6.275 ; U555.3@9.475,4.925 U555.3 9.454,4.925 U555.3@9.604,4.775 ; J1.4@9.87,2.4 9.87,3.538 ; 9.975,5.425 C24.2 ; C25.2 v2(14.325,-4.45)
  Top Layer w0.125: v1(-14.3,1.35) -14.3,1.788 -13.838,2.25 SW1.1 ; v1(-14.25,-5.775) -14.25,-5.125 -13.285,-5.125 U3.2 ; C13.2@-13.421,-5.629 -13.045,-5.252 -13.045,-4.99 U3.5 -12.705,-3.808 -12.35,-3.453 C26.2@-12.35,-3.425 ; v1(-13.225,-6.45) C13.2 ; v1(-11.275,-5.725) C10.2 ; C3.2 -10.85,2.475 v1(-10.225,2.475) C12.2 ; v1(-10.325,-5.725) C9.2 ; U1.21 -9.95,-0.375 U1.10 -9.95,1.705 -9.756,1.899 -9.663,1.899 -9.575,1.987 C12.2 ; v1(-10.1,6.975) -9.875,6.975 -9.325,6.425 U6.6 ; C7.2 -9.563,3.662 -9.563,2.488 C12.2 ; v1(-9.375,-5.725) C17.2 ; v1(-8.425,-5.725) C15.2 ; v1(-7.475,-5.725) C14.2 ; C19.2 v1(0.5,-5.075) ; v1(0.575,-1.85) 1.275,-1.85 C4.2 ; D1.3 4.225,-6.025 v1(5.025,-6.825) ; U5.4 5.55,1.675 5.85,1.975 v1(5.9,1.975) 6.4,1.975 6.725,1.65 6.725,1.4 D2.1 ; v1(5.875,-1.875) 5.963,-1.875 6.163,-1.675 6.775,-1.675 R4.2 ; v1(7.105,5.8) 7.115,5.79 7.115,5.035 u888.3 ; v1(14.425,-1.15) 14.425,-0.475 R3.1
INFO_LED1: R8.2 u888.6 | length 1
  Top Layer w0.125: R8.2 7.647,2.922 u888.6@7.647,3.672 ; u888.6@7.647,3.675 u888.6@7.647,3.672 ; u888.6 u888.6@7.647,3.672
INFO_LED2: R10.2 u888.7 | length 1
  Top Layer w0.125: u888.7 8.175,3.525 8.475,3.225 R10.2
NetD2_2: D2.2 R8.1 | length 2.9
  Top Layer w0.125: D2.2 7.908,-0.218 7.908,0.996 7.771,1.133 7.644,1.26 7.644,1.681 R8.1
NetD2_3: D2.3 R9.1 | length 1.3
  Top Layer w0.12: R9.1 7.795,-1.7 8.01,-1.486 8.01,-1.465 8.335,-1.14 8.335,-0.84 D2.3
NetD2_4: D2.4 R10.1 | length 1.2
  Top Layer w0.125: R10.1 8.491,1.834 8.491,0.684 D2.4
NetJ1_A5: J1.A5 R3.2 | length 2.3
  Top Layer w0.1: J1.A5 13.595,0.75 14.115,0.75 14.415,0.45 R3.2
NetJ1_B5: J1.B5 R4.1 | length 8
  Top Layer w0.12: v2(6.725,-4.275) 6.725,-3.582 6.8,-3.507 R4.1
  Bottom Layer w0.12: v2(6.725,-4.275) 6.725,-3.756 9.143,-1.338 10.908,-1.338 11.22,-1.65 J1.B5
NetJ10_1: J10.1 U2.20 | length 19.8
  Top Layer w0.1: U2.20 4.737,-0.75 4.862,-0.625 v1(4.95,-0.625)
  Bottom Layer w0.1: v1(4.95,-0.625) 4.95,-1.314 4.555,-1.709 4.555,-3.471 4.698,-3.615 4.779,-3.615 4.786,-3.622 5.114,-3.622 5.48,-3.256 5.48,-2.829 8.475,0.166 8.475,2.475 10.933,4.933 11.283,4.933 J10.1
NetJ10_2: J10.2 U2.19 | length 12.7
  Top Layer w0.1: U2.19 4.761,-1.15 4.768,-1.156 5.24,-1.156 5.247,-1.15 5.353,-1.15 5.875,-0.628 v1(5.875,-0.625)
  Bottom Layer w0.1: v1(5.875,-0.625) 6.346,-0.154 6.346,0.771 7.505,1.93 7.505,2.216 11.43,6.141 J10.2
NetJ10_3: J10.3 U2.18 | length 17.9
  Top Layer w0.1: U2.18 4.65,-1.55 4.767,-1.433 5.537,-1.433 5.658,-1.312 5.813,-1.312 v1(5.875,-1.25)
  Bottom Layer w0.1: v1(5.875,-1.25) 7.725,0.6 7.725,2.125 12.25,6.65 12.25,8.206 12.016,8.44 11.035,8.44 10.215,7.62 J10.3
NetJ10_4: J10.4 U2.17 | length 11.5
  Top Layer w0.1: U2.17 4.85,-1.95 4.927,-1.873 v1(4.95,-1.873)
  Bottom Layer w0.1: v1(4.95,-1.873) 4.95,-1.783 5.17,-1.563 5.17,-0.964 5.48,-0.654 5.48,0.303 6.8,1.623 6.8,3.175 6.35,3.625 J10.4
NetJ10_5: J10.5 U2.14 | length 12.4
  Top Layer w0.1: U2.14 3.975,-3.175 4.898,-3.175 v1(4.95,-3.227)
  Layer 1 w0.1: J10.5 3.81,5.391 4.02,5.181 4.02,2.014 4.545,1.489 4.545,-0.779 4.615,-0.849 4.615,-1.649 4.555,-1.709 4.555,-2.037 4.615,-2.097 4.615,-2.812 4.95,-3.147 v1(4.95,-3.227)
NetJ10_6: J10.6 U2.13 | length 16.1
  Top Layer w0.1: U2.13 4.634,-3.55 4.763,-3.679 5.27,-3.679 5.391,-3.8 5.846,-3.8 v1(5.875,-3.829)
  Layer 1 w0.1: J10.6 1.291,7.62 2.755,6.156 2.755,0.361 3.031,0.085 3.256,0.085 4.395,-1.054 4.395,-1.558 4.335,-1.618 4.335,-2.128 4.395,-2.188 4.395,-3.231 4.563,-3.398 4.786,-3.622 5.573,-3.622 5.78,-3.829 v1(5.875,-3.829)
NetJ10_7: J10.7 U2.12 | length 19
  Top Layer w0.1: U2.12 4.575,-3.95 4.606,-3.981 5.137,-3.981 5.258,-4.102 5.509,-4.102 5.838,-4.431 v1(5.875,-4.431)
  Layer 1 w0.1: J10.7 0.11,7.62 0.93,6.8 1.8,6.8 2.535,6.065 2.535,0.27 2.94,-0.135 3.165,-0.135 4.175,-1.145 4.175,-1.467 4.115,-1.527 4.115,-2.219 4.175,-2.279 4.175,-3.322 4.695,-3.842 5.286,-3.842 v1(5.875,-4.431)
NetJ10_8: J10.8 U2.11 | length 21.5
  Top Layer w0.1: U2.11 4.786,-4.35 4.869,-4.433 v1(4.95,-4.433)
  Layer 1 w0.1: J10.8 -3.81,2.566 -4.095,2.281 -4.095,-2.239 -3.44,-2.894 -1.69,-2.894 -1.139,-3.445 -0.758,-3.445 -0.585,-3.272 0.36,-3.272 1.06,-3.972 1.06,-4.205 1.575,-4.72 3.765,-4.72 4.052,-4.433 v1(4.95,-4.433)
NetJ10_9: J10.9 U1.11 | length 10
  Top Layer w0.1: v1(-11.827,3) -11.827,2.002 -11.45,1.625 -10.52,1.625 -10.45,1.555 U1.11
  Bottom Layer w0.1: v1(-11.827,3) -11.35,3 -10.025,4.325 -9.645,4.325 J10.9
NetJ10_10: J10.10 U1.12 | length 10.6
  Top Layer w0.1: v1(-12.275,1.275) -12.18,1.275 -12.03,1.125 U1.12
  Bottom Layer w0.1: v1(-12.275,1.275) -12.805,1.805 -12.805,5.47 -12.62,5.655 -11.261,5.655 -10.515,6.402 -10.515,7.119 -10.014,7.62 J10.10
NetJ10_11: J10.11 U1.13 | length 9.4
  Top Layer w0.1: v1(-12.925,0.775) -12.83,0.775 -12.68,0.625 U1.13
  Bottom Layer w0.1: v1(-12.925,0.775) -12.925,1.614 -13.025,1.714 -13.025,6.316 -12.966,6.375 -12.675,6.375 J10.11
NetJ10_13: J10.13 U1.14 | length 12.1
  Top Layer w0.1: v1(-13.5,0.775) -13.5,0.68 -13.312,0.493 -13.312,0.437 -13.242,0.367 -12.517,0.367 -12.275,0.125 U1.14
  Bottom Layer w0.12: J10.13 -14.96,-6.63 -14.96,-0.441 -13.808,0.712 -13.563,0.712 v1(-13.5,0.775)
NetJ10_14: J10.14 U1.15 | length 11.7
  Top Layer w0.1: v1(-12.9,-0.175) -12.845,-0.23 -12.525,-0.23 -12.38,-0.375 U1.15
  Bottom Layer w0.12: v1(-12.9,-0.175) -13.305,0.23 -13.643,0.23 -14.15,-0.277 -14.15,-2.665 -13.845,-2.97 -13.845,-3.728 -11.43,-6.143 J10.14
NetJ10_15: J10.15 U1.16 | length 12.1
  Top Layer w0.1: v1(-13.475,-0.175) -13.08,-0.57 -12.633,-0.57 -12.328,-0.875 U1.16
  Bottom Layer w0.1: v1(-13.475,-0.175) -13.87,-0.57 -13.87,-1.914 -10.88,-4.904 -10.88,-5.729 -8.989,-7.62 J10.15
NetJ10_16: J10.16 U1.17 | length 13
  Top Layer w0.1: v1(-13.475,-1.2) -13.08,-0.805 -12.709,-0.805 -12.419,-1.095 -12.196,-1.095 -11.916,-1.375 U1.17
  Bottom Layer w0.12: v1(-13.475,-1.2) -13.475,-1.937 -11.532,-3.88 -9.697,-3.88 -7.88,-5.697 -7.88,-6.09 J10.16
NetJ10_17: J10.17 U1.18 | length 14.4
  Top Layer w0.1: v1(-12.9,-1.2) -12.833,-1.267 -12.558,-1.267 -12,-1.825 -11.4,-1.825 U1.18
  Bottom Layer w0.12: v1(-12.9,-1.2) -12.9,-2.173 -12.223,-2.85 -8.225,-2.85 -5.725,-5.35 -5.725,-5.705 J10.17
NetJ10_18: J10.18 R7.1 U6.10 | length 22.6
  Top Layer w0.1: R7.1 -12.369,4.694 -11.588,4.694 -11.395,4.5 v1(-11.3,4.5)
  Top Layer w0.2: v1(-11.3,4.5) -10.775,5.025 U6.10
  Bottom Layer w0.1: v1(-11.3,4.5) -12.085,3.715 -12.123,3.715 -12.542,3.296 -12.542,3.258 -12.55,3.25 -12.55,2.475 -6.045,-4.03 -1.961,-4.03 -1.645,-4.346 -1.645,-6.92 -1.27,-7.295 J10.18
NetJ10_19: J10.19 U777.13 | length 15.3
  Top Layer w0.1: U777.13 4.634,3.45 4.763,3.321 5.27,3.321 5.391,3.2 5.846,3.2 v1(5.875,3.171)
  Bottom Layer w0.15: J10.19 4.175,-4.715 4.175,-0.819 4.57,-0.424 4.57,0.351 4.57,0.699 4.57,1.151 4.57,1.499 4.525,1.544 4.525,2.736 4.96,3.171 v1(5.875,3.171)
NetJ10_20: J10.20 U6.9 | length 27.6
  Top Layer w0.2: v1(-11.45,5.2) -11.225,5.425 U6.9
  Bottom Layer w0.2: v1(-11.45,5.2) -11.382,5.2 -11.127,4.945 -11.116,4.945 -10.731,4.56 -10.731,4.44 -11.646,3.525 -11.65,3.525 -11.73,3.445 -12.011,3.445 -12.272,3.184 -12.272,2.816 -11.081,1.625 -10.57,1.625 -6.045,-2.9 -2.416,-2.9 0.204,-5.52 0.204,-7.784 0.91,-8.49 1.776,-8.49 2.646,-7.62 J10.20
NetJ10_21: J10.21 R12.2 | length 1.4
  Top Layer w0.2: J10.21 6.425,-7.545 6.425,-6.325 R12.2
NetJ10_22: J10.22 U777.12 | length 19.7
  Top Layer w0.1: U777.12 4.575,3.05 4.606,3.019 5.137,3.019 5.258,2.898 5.509,2.898 5.838,2.569 v1(5.875,2.569)
  Layer 1 w0.1: v1(5.875,2.569) 6.729,1.715 7.077,1.715 7.66,1.132 7.66,0.784 7.715,0.729 7.715,-3.215 9.82,-5.32 10.29,-5.32 12.25,-7.28 12.25,-7.96 11.77,-8.44 9.71,-8.44 J10.22
NetJ10_23: J10.23 U777.11 | length 14.7
  Top Layer w0.1: U777.11 4.786,2.65 4.869,2.567 v1(4.95,2.567)
  Layer 1 w0.1: v1(4.95,2.567) 4.95,2.186 5.611,1.525 6.6,1.525 6.63,1.495 6.986,1.495 7.44,1.041 7.44,0.693 7.495,0.638 7.495,-3.357 7.75,-3.612 7.75,-3.625 11.43,-7.305 J10.23
NetR5_1: R5.1 SW1.2 | length 19.1
  Top Layer w0.1: v1(-14.575,-0.6) -14.575,-1.209 -14.45,-1.334 -14.45,-1.725 -13.975,-2.2 SW1.2 ; v1(-1.25,-5.75) -1.25,-5.1 R5.1
  Layer 1 w0.1: v1(-14.575,-0.6) -14.575,-1.825 -12.667,-3.733 -11.679,-3.733 -10.062,-5.35 -9.22,-5.35 -9.215,-5.355 -8.585,-5.355 -8.58,-5.35 -8.27,-5.35 -8.265,-5.355 -7.635,-5.355 -7.63,-5.35 -7.32,-5.35 -7.315,-5.355 -1.645,-5.355 v1(-1.25,-5.75)
NetR6_2: R6.2 U555.4 | length 2.1
  Top Layer w0.2: U555.4 12.725,4.925 13.225,5.425 R6.2
NetR12_1: R12.1 R13.2 U777.14 | length 19.2
  Top Layer w0.1: U777.14 3.975,3.825 4.898,3.825 v1(4.95,3.773) ; R12.1 7.4,-6.275 7.925,-6.8 9.65,-6.8 v2(10.05,-7.2)
  Top Layer w0.2: R12.1@7.5,-6.375 7.925,-6.8
  Layer 1 w0.1: v1(4.95,3.773) 4.505,3.328 4.505,2.32 5.55,1.275 6.741,1.275 7.2,0.816 7.2,-3.345 7.55,-3.695 7.55,-5.23 8.945,-6.625 9.475,-6.625 v2(10.05,-7.2)
NetU1_19: U1.19 U4.30 | length 12.2
  Top Layer w0.125: v1(-12.15,-2.35) -12.138,-2.362 -11.362,-2.362 U1.19 ; U4.30 -6.87,2.581 -6.869,2.582 -6.531,2.582 -6.292,2.344 -6.292,-1.355 -6.4,-1.462 v1(-6.4,-1.55)
  Mid-Layer 1 w0.125: v1(-12.15,-2.35) -7.2,-2.35 v1(-6.4,-1.55)
NetU4_20: U4.20 X1.3 | length 1.4
  Top Layer w0.1: U4.20 -3.505,4.595 -3.412,4.688 -3.412,4.738 -3.137,5.012 X1.3
NetU4_29: U4.29 u888.2 | length 22.8
  Top Layer w0.125: U4.29 -6.181,2.981 v1(-6.175,2.975) ; u888.2 7.662,5.037 7.662,5.787 v1(7.675,5.8)
  Bottom Layer w0.125: v1(-6.175,2.975) -6.175,6.432 -4.007,8.6 7.027,8.6 7.675,7.952 v1(7.675,5.8)
NetU6_7: U6.7 | length 1.1
  Top Layer w0.2: v1(-10.95,6.525) -10.882,6.525 -10.582,6.225 U6.7
NetU6_8: U6.8 | length 1.6
  Top Layer w0.2: v1(-11.45,6.05) -11.425,6.05 -11.2,5.825 U6.8
NetU777_17: U777.17 | length 1
  Top Layer w0.1: U777.17 4.85,5.05 4.927,5.127 v1(4.95,5.127)
NetU777_18: U777.18 | length 2
  Top Layer w0.1: U777.18 4.65,5.45 4.767,5.567 5.537,5.567 5.658,5.688 5.813,5.688 v1(5.875,5.75)
NetU777_19: U777.19 | length 2.1
  Top Layer w0.1: U777.19 4.761,5.85 4.768,5.844 5.24,5.844 5.247,5.85 5.353,5.85 5.875,6.372 v1(5.875,6.375)
NetU777_20: U777.20 | length 1.1
  Top Layer w0.1: U777.20 4.737,6.25 4.862,6.375 v1(4.95,6.375)
OE: U4.31 U6.3 | length 5.5
  Top Layer w0.125: U6.3 v1(-7.625,5.425) ; U4.31 -7.537,2.178 -6.703,2.178 v1(-6.7,2.175)
  Layer 1 w0.125: v1(-7.625,5.425) -6.7,4.5 v1(-6.7,2.175)
P1V1: C5.1 C6.1 C18.1 U4.23 U4.45 U4.50 | length 15.4
  Top Layer w0.1: C6.1 -6.503,-4.175 -5.942,-3.614 -5.942,-3.091 U4.45 ; C5.1@-5.2,5.05 C5.1 -5.15,5.05 -4.705,4.605 U4.23 ; -4.324,-2.163 -3.905,-2.581 ; U4.50 -3.905,-3.595 -3.832,-3.668 -3.032,-3.668 -2.525,-4.175 C18.1
  Top Layer w0.2: U4.45@-5.9,-3.049 -5.9,-2.163 ; -4.875,3 -4.705,3.17 U4.23 ; U4.50 -3.905,-2.581
  Top Layer w0.3: -4.875,3 -4.975,2.9 -5.475,2.9 -5.9,2.475 -5.9,2.039 -5.925,2.014 -5.925,-1.252 -5.9,-1.277 -5.9,-2.163 -4.324,-2.163
P3V3: C1.1 C2.1 C4.1 C7.1 C8.1 C11.1 C12.1 C14.1 C15.1 C16.1 C17.1 C19.1 C21.1 C23.1 C26.1 C27.1 R9.2 R11.2 U2.5 U2.6 U3.1 U4.1 U4.10 U4.22 U4.33 U4.42 U4.43 U4.44 U4.48 U4.49 U5.8 U6.1 U6.12 U777.5 U777.6 u888.1 X1.1 X1.4 | length 48.7
  Top Layer w0.1: v1(-14.25,-3.4) -14.25,-4.225 -14.15,-4.325 U3.1 ; U4.48 -4.705,-3.557 -4.537,-3.725 -4.299,-3.725 ; U4.49 -4.299,-3.06 -4.299,-3.725 ; U4.22 -4.305,4.97 C11.1 -4.2,5.05 -3.71,5.54 -3.71,6.373 -3.333,6.75 v1(-3.1,6.75) ; v1(-3.1,-5.75) -3.1,-4.725 -3.65,-4.175 -3.7,-4.175 -4.15,-3.725 -4.299,-3.725 ; X1.4 X1.1 -1.776,5.95 C2.1 -0.75,5.95 -0.175,6.525 -0.173,6.525 v1(-0.1,6.6) v1(-0.1,6.6) ; U4.1 -0.67,-2.677 -0.3,-3.047 C19.1 v1(0.5,-4.175) ; U4.10 0.444,1.381 C23.1 0.55,1.475 v1(0.55,2.2) ; v1(1.075,3.75) 1.336,4.011 1.336,4.411 C21.1 ; C1.1 1.389,0.386 1.739,0.386 1.92,0.205 2.32,0.205 U5.8 ; v1(1.4,-0.375) 1.4,0.188 1.489,0.277 C1.1@1.498,0.277 ; U777.6 2.384,4.266 1.559,4.266 C21.1 ; U777.5 2.384,4.634 1.559,4.634 C21.1 ; R11.2 6.425,1.075 6.825,0.675 v1(6.825,0.65) ; v1(7.175,-3.85) 7.175,-3.2 7.537,-2.838 7.537,-2.824 7.76,-2.6 R9.2 ; u888.1 8.55,5.025 8.625,4.95 8.625,4.783 8.966,4.441 C8.1
  Top Layer w0.125: C26.1@-13.25,-3.425 -13.25,-4.21 U3.1 ; U6.12 -9.288,4.588 -9.288,4.338 -8.65,3.7 -8.662,3.687 -8.662,2.488 C12.1 -8.575,2.375 -8.575,1.563 -8.393,1.381 U4.33 ; U6.1 -8.65,4.6 C7.1 v1(-7.95,3.675) ; C15.1 v1(-8.425,-3.525) -7.875,-2.975 -7.875,-2.875 -7.725,-2.725 -7.225,-2.725 -6.925,-2.425 -6.378,-2.425 -6.305,-2.498 U4.44 ; U4.42 -8.194,-2.219 -9.375,-3.4 C17.1 C14.1 -7.475,-3.25 -7.25,-3.025 -6.734,-3.025 U4.43 ; v1(0.575,-2.425) 0.575,-2.373 0.648,-2.3 0.8,-2.3 1.3,-2.8 C4.1 ; C4.1@1.375,-2.75 U2.6 ; C4.1@1.4,-2.75 1.8,-2.35 U2.5 ; u888.1 8.175,5.175 8.5,5.5 v1(8.5,5.8)
  Mid-Layer 1 w0.1: v1(0.5,-4.175) v1@0.537,-4.138 ; v1@0.537,-2.462 v1(0.575,-2.425)
P5V: C3.1 C9.1 C10.1 C13.1 C20.1 C22.1 C24.1 C25.1 D3.1 J10.24 R7.2 U1.1 U1.20 U2.16 U3.3 U3.4 U6.11 U555.5 U777.16 | length 81.1
  Top Layer w0.1: U2.16 4.8,-2.35 4.975,-2.525 C20.1 4.975,-2.575 5.579,-3.179 5.827,-3.179 v1(5.875,-3.227) ; U777.16 4.8,4.65 4.975,4.475 C22.1 4.975,4.425 5.579,3.821 5.827,3.821 v1(5.875,3.773)
  Top Layer w0.2: R7.2 -12.5,3.95 -11.995,3.445 -11.557,3.445 -11.538,3.425 C3.1 ; C13.1 -12.325,-5.025 U3.3 -12.095,-4.975 -12.05,-4.975 -11.905,-4.83 -11.905,-4.325 ; U3.4 -11.905,-4.325 ; v1(-11.25,-3.475) -11.262,-3.487 -11.262,-4.313 C10.1@-11.275,-4.325 ; U1.20 -10.43,-2.795 -10.43,-3.225 -10.325,-3.33 ; v1(-10.225,3.4) -10.238,3.413 -10.888,3.413 C3.1 ; U6.11 -10.5,4.625 -10.9,4.225 C3.1 ; U1.1 -9.95,-2.955 -10.325,-3.33 ; U555.5 11.45,6.275 12.25,6.275 C24.1 12.3,6.875 v2(12.7,7.275) ; -11.905,-4.325 C10.1@-11.275,-4.325 ; C10.1@-11.275,-4.325 -10.475,-4.325 C9.1 -10.325,-3.33
  Top Layer w0.5: D3.1 13.245,-5.75 13.67,-6.175 14.3,-6.175 C25.1 14.325,-7.049 13.97,-7.404 J10.24
  Mid-Layer 1 w0.2: v1@5.848,3.773 5.43,3.355 5.109,3.355 4.505,2.751 4.505,2.147 5.699,0.953 5.699,0.444 5.43,0.175 5.43,-2.782 v1(5.875,-3.227) ; v1(5.875,3.773) 9.198,3.773 v2(12.7,7.275)
  Layer 1 w0.2: v1(-10.225,3.4) -11.25,2.375 v1(-11.25,-3.475) -9.625,-5.1 -9.116,-5.1 -9.111,-5.105 -8.689,-5.105 -8.684,-5.1 -8.166,-5.1 -8.161,-5.105 -7.739,-5.105 -7.734,-5.1 -7.216,-5.1 -7.211,-5.105 -1.294,-5.105 -0.899,-5.5 5.407,-5.5 6.3,-4.607 6.3,-3.652 v1(5.875,-3.227)
  Layer 1 w0.5: v1(5.875,3.773) 5.882,3.766 6.121,3.766 8.475,1.412 8.475,-3.217 10.158,-4.9 11.866,-4.9 12.47,-5.504 12.47,-6.12 J10.24
QSPI_SCLK: U4.52 U5.6 | length 10.2
  Top Layer w0.1: v1(-3.325,-1.55) -3.305,-1.57 -3.305,-2.232 -3.105,-2.432 U4.52 ; U5.6 2.912,1.175 3.062,1.325 v1(3.15,1.325)
  Bottom Layer w0.1: v1(-3.325,-1.55) -2.794,-1.019 -2.794,-0.839 -2.33,-0.375 -2.013,-0.375 -1.813,-0.175 -0.771,-0.175 -0.396,0.2 1.18,0.2 2.305,1.325 v1(3.15,1.325)
QSPI_SD0: U4.53 U5.5 | length 11.1
  Top Layer w0.1: U4.53 -2.705,-2.521 -2.945,-2.281 -2.945,-1.686 -2.635,-1.377 -2.552,-1.377 -2.242,-1.067 -2.242,-0.817 v1(-2.175,-0.75) ; U5.5 2.875,1.675 v1(3.15,1.95)
  Bottom Layer w0.1: v1(-2.175,-0.75) -2.105,-0.75 -1.73,-0.375 -0.688,-0.375 -0.313,0 1.263,0 2.163,0.9 3.255,0.9 3.525,1.17 3.525,1.575 v1(3.15,1.95)
QSPI_SD1: U4.55 U5.2 | length 8.6
  Top Layer w0.1: U4.55 -1.905,-2.734 -1.775,-2.604 -1.775,-2.55 v1(-1.475,-2.25) ; v1(4.15,0.525) 4.238,0.525 4.388,0.675 U5.2
  Bottom Layer w0.1: v1(-1.475,-2.25) -1.429,-2.25 -0.8,-1.621 -0.8,-1.575 -0.385,-1.16 1.904,-1.16 2.974,-0.09 3.535,-0.09 v1(4.15,0.525)
QSPI_SD2: U4.54 U5.3 | length 10.4
  Top Layer w0.1: v1(-2.55,-1.85) -2.495,-1.905 -2.495,-2.389 -2.319,-2.565 -2.319,-3.04 U4.54 ; v1(4.15,1.325) 4.238,1.325 4.388,1.175 U5.3
  Bottom Layer w0.1: v1(-2.55,-1.85) -1.857,-1.85 -1.832,-1.875 -1.337,-1.875 -1,-1.538 -1,-1.492 -0.458,-0.95 1.831,-0.95 2.891,0.11 3.265,0.11 3.674,0.519 3.674,0.849 v1(4.15,1.325)
QSPI_SD3: U4.51 U5.7 | length 10
  Top Layer w0.1: v1(-3.7,-2.075) -3.7,-2.17 -3.505,-2.365 U4.51 ; U5.7 2.912,0.675 3.062,0.525 v1(3.15,0.525)
  Bottom Layer w0.1: v1(-3.7,-2.075) -3.305,-2.075 -2.705,-1.475 -1.95,-1.475 -1.75,-1.675 -1.42,-1.675 -1.2,-1.455 -1.2,-1.409 -0.541,-0.75 1.555,-0.75 2.775,0.47 3.095,0.47 v1(3.15,0.525)
QSPI_SS: R5.2 R11.1 U4.56 U5.1 | length 10.7
  Top Layer w0.1: U4.56 -1.501,-3.05 v1(-0.975,-3.05) ; v1(4.15,-0.25) 4.212,-0.188 4.212,-0.038 4.425,0.175 U5.1 R11.1
  Top Layer w0.125: R5.2 -1.203,-4.175 -0.991,-3.963 -0.991,-3.941 -0.975,-3.925 v1(-0.975,-3.05)
  Bottom Layer w0.1: v1(-0.975,-3.05) -0.975,-2.079 -0.6,-1.704 -0.6,-1.675 -0.285,-1.36 1.987,-1.36 3.037,-0.31 4.09,-0.31 v1(4.15,-0.25)
RESET: U4.26
USB_N: R2.2 U4.46 | length 1.2
  Top Layer w0.1: R2.2@-5.725,-4.175 -5.705,-4.175 -5.505,-3.975 U4.46
USB_P: R1.2 U4.47 | length 1.3
  Top Layer w0.1: U4.47 -5.105,-3.712 -4.642,-4.175 R1.2
VUSB: D3.2 J1.A4 J1.A9 J1.B4 J1.B9 | length 12.7
  Top Layer w0.5: D3.2 v2(11.875,-5.75)
  Mid-Layer 1 w0.45: 12.02,-1.965 12.02,1.965
  Mid-Layer 1 w0.5: 12.02,-1.965 12.02,-2.021 12.695,-2.696 J1.A9 ; 12.02,1.965 12.02,2.021 12.695,2.696 J1.A4
  Bottom Layer w0.41: 12.02,-4.193 12.02,-3.507
  Bottom Layer w0.5: J1.B4@11.345,-2.696 J1.B4 11.345,-2.804 12.02,-3.479 ; J1.B9 J1.A4 ; v2(11.875,-5.75) 11.875,-4.862 12.02,-4.717 12.02,-4.193 ; 12.02,-3.507 12.02,-3.479 ; J1.A9 12.695,-2.804 12.02,-3.479
pads on no net: J1.A8 J1.B8 U4.21 U4.24 U4.25 U5.9 u888.8

## Polygon pours and split planes (outlines as drawn)
GND on Mid-Layer 1 "GND_L02_P000" (solid, remove dead copper, pour order 0): -15.755,-8.9 -15.755,8.9 15.32,8.9 15.32,-8.9
P3V3 on Layer 1 "P3V3_L03_P004" (solid, remove dead copper, pour order 4): 15.429,8.9 -15.94,8.9 -15.94,-8.9 15.429,-8.9
GND on Bottom Layer "GND_L04_P005" (solid, remove dead copper, pour order 5): -15.94,-8.9 -15.94,8.9 15.429,8.9 15.429,-8.9
GND on Top Layer "GND_L01_P006" (solid, remove dead copper, pour order 6): -15.94,-8.9 -15.94,8.9 15.683,8.9 15.683,-8.9

## Keep-outs
Keep-Out Layer:
  the board outline again, w0.25

## Silkscreen, mask and mechanical layers (free items; w line width, h text height)
Top Overlay:
  text "2732/2716" at 3.293,-6.162 h1.5
Board Layer Stack Bottom Overlay:
  drawing of 68 lines, arcs and shapes, not listed
  text "SILICONVALLEYGARAGE" at -10.2,7.62 h1.4 r90
  text "INSTRUMENTS" at -6.562,7.62 h1.5 r90
  text "EE1632 / Eprom Emulator" at 7.7,5.9 h2 r90
Board:
  the board outline again, w0.1

## Text inside footprints (layer, text, board x,y; h text height)
D2: Top Assembly "K" at 7.725,0.4 h0.5 r90
D3: Top Assembly "K" at 13.52,-5.525 h0.4 r180
U3: Top Assembly "1" at -13.315,-4.425 h0.3
U555: Top Assembly "1" at 9.025,6.025 h0.5